# Altium PCB MCU_PCB.PcbDoc (part 2 of 2)
Units mm, origin at the board's own origin, x right, y up, seen from the top; angles counter-clockwise.
Board outline 44.96 x 8.25 mm, 4 copper layers (Top Layer, Layer 1, Layer 2, Bottom Layer), stack 0.797 mm thick; 87 components, 49 nets, 262 pads, 147 vias.
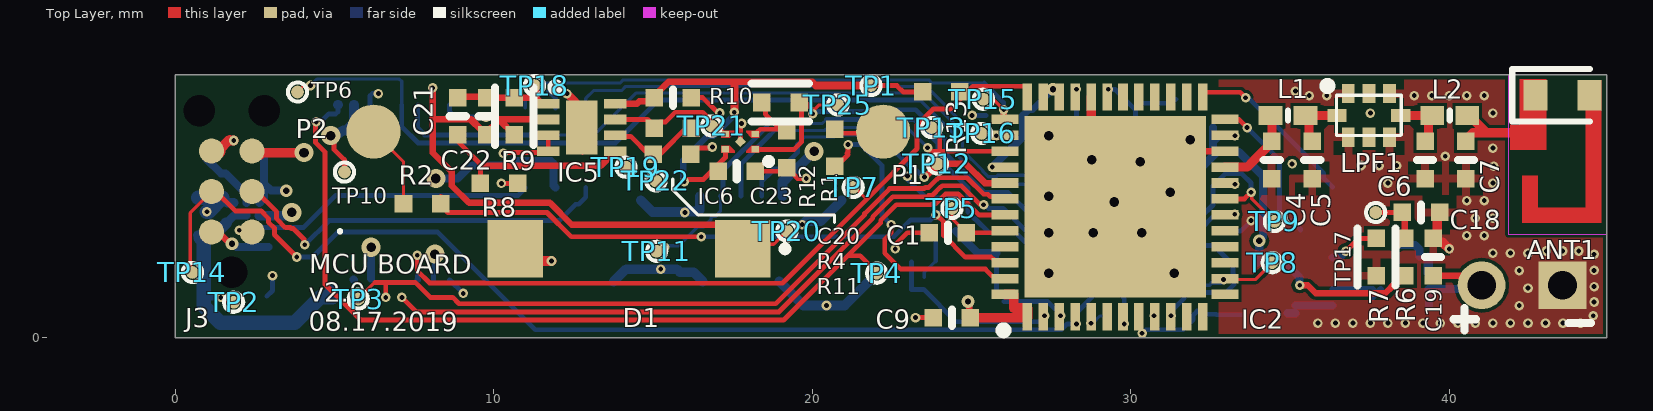
[diagram p0: Top Layer view]

## Via types
v1: diameter 0.3, hole 0.15, Top Layer to Bottom Layer, tented both sides, 123 vias
v2: diameter 0.6, hole 0.3, Top Layer to Bottom Layer, tented bottom, 12 vias
v3: diameter 0.6, hole 0.3, Top Layer to Bottom Layer, tented both sides, 7 vias
v4: diameter 0.4, hole 0.2, Top Layer to Bottom Layer, tented both sides, 5 vias

## Nets (pads, with @x,y where several pads share a name; then routed paths per layer and width w, separated by ;. In a path a pad name is that pad's centre, name@x,y a point inside that pad or via, vN(x,y) a via of type N, cw(c..) or ccw(c..) an arc to the next point about the centre after c; other vN are vias at no path point) (continued)
LH_SIG: (continued)
  Top Layer w0.152: IC6.1 19.434,5.921 19.66,6.147 19.66,7.315 R10.1 ; R10.1@19.787,7.391 20.015,7.163 v1(20.015,7.036)
  Bottom Layer w0.102: v1(31.267,0.693) v1@31.267,0.838
  Bottom Layer w0.152: v1@20.066,7.112 22.447,7.112 22.498,7.163 23.251,7.163 24.204,6.21 24.204,5.768 25.4,4.572 26.142,4.572 26.934,3.78 30.551,3.78 30.831,3.5 30.831,3.459 31.39,2.9 32.609,2.9 33.213,2.296 33.213,1.998 33.246,1.965 33.246,1.68 32.989,1.422 31.852,1.422 31.822,1.393 31.782,1.393 31.678,1.288 31.678,1.249 v1@31.267,0.838
NetANT1_1: ANT1.1 C7.2 L2.2 | length 3.1
  Top Layer w0.287: C7.2@40.538,6.23 40.748,6.44 41.178,6.44 ; L2.2@40.794,6.825 41.178,6.44 ; 42.531,6.44 41.178,6.44
  Top Layer w0.305: L2.2 40.646,6.985 40.794,6.837 L2.2@40.794,6.825 ; 42.172,6.546 42.189,6.528
  Top Layer w0.457: 42.426,6.546 42.531,6.44
NetC5_2: C5.2 L1.2 LPF1.8 | length 1.9
  Top Layer w0.287: L1.2 LPF1.8 ; C5.2@35.603,6.273 L1.2@35.603,6.873
  Top Layer w0.305: L1.2 L1.2@35.603,6.873 ; C5.2@35.603,6.273 C5.2
NetC6_2: C6.2 L2.1 LPF1.4 | length 1.9
  Top Layer w0.287: LPF1.4 L2.1 ; C6.2@39.357,6.286 L2.1@39.357,6.871
  Top Layer w0.305: C6.2 C6.2@39.357,6.286 ; L2.1@39.357,6.871 L2.1
NetC21_2: C21.2 IC5.5 R8.1 TP19.1 | length 7.1
  Top Layer w0.102: IC5.5@13.729,5.778 TP19.1
  Top Layer w0.152: C21.2 8.865,6.172 9.576,5.461 ; R8.1 9.576,5.461 ; 9.627,5.41 9.576,5.461
  Top Layer w0.203: 9.627,5.41 13.362,5.41 IC5.5@13.729,5.778 ; 13.586,5.634 IC5.5
NetDS1_1: DS1.1 R6.1 | length 4.5
  Top Layer w0.203: v1(35.306,1.651) 35.56,1.651 35.814,1.397 37.998,1.397 38.197,1.597 38.197,1.621 38.358,1.782 38.435,1.782 38.481,1.829 38.481,1.905 38.532,1.956 R6.1
  Bottom Layer w0.254: DS1.1@34.925,2.274 35.297,1.902 35.297,1.66 v1(35.306,1.651)
NetDS1_2: DS1.2 IC4.5 | length 1.4
  Bottom Layer w0.254: DS1.2@34.925,0.774 35.167,0.774 DS1.2@35.179,0.762 ; DS1.2@35.179,1.016 IC4.5@36.334,1.016
NetIC1_4: IC1.4 J3.3 | length 12.2
  Top Layer w0.152: J3.3@2.54,4.597 3.176,3.962 3.176,3.74 3.455,3.461 3.611,3.461 3.637,3.434 3.704,3.434 4.034,3.104 4.034,2.949 v1(4.062,2.921)
  Bottom Layer w0.152: v1@4.064,2.921 4.826,3.683 12.053,3.683 12.566,4.195 12.664,4.195 12.888,4.419 IC1.4
NetIC1_6: IC1.6 J3.1 | length 10.1
  Top Layer w0.152: v1(2.007,3.378) 2.057,3.327 J3.1 J3.1@2.54,3.327
  Bottom Layer w0.152: v1(2.007,3.378) 2.047,3.378 2.129,3.461 4.019,3.461 5.034,4.475 10.764,4.475 10.988,4.699 IC1.6
NetIC2_5: IC2.5 TP23.1 | length 0.6
  Top Layer w0.102: v1(28.753,0.457) 28.753,0.61 28.758,0.615 IC2.5
  Bottom Layer w0.102: v1(28.753,0.457) 28.804,0.457 29.032,0.686 TP23.1
NetIC2_9: IC2.9 TP24.1
  other v1: 30.734,0.693
NetIC3_B1: IC3.B1 L4.1 | length 2.1
  Bottom Layer w0.254: L4.1 0.98,5.616 1.428,5.168 1.578,5.168 2.235,4.51 IC3.B1
NetIC4_8: IC4.8 R7.2 | length 1.6
  Top Layer w0.152: v1(36.761,2.725) 37.16,3.124 R7.2
  Bottom Layer w0.254: IC4.8 36.564,2.528 v1(36.761,2.725)
NetIC5_7: IC5.7 IC6.4 R4.1 TP21.1 | length 4
  Top Layer w0.152: IC5.7 14.834,6.858 R4.1@14.986,6.706 ; R4.1 15.236,6.777 15.388,6.777 15.697,7.087 16.554,7.087 16.908,6.733 16.919,6.733 17.252,6.401 IC6.4
NetIC6_2: IC6.2 R10.2 R12.2 | length 1.9
  Top Layer w0.152: IC6.2 18.232,6.401 18.281,6.45 18.281,6.47 18.364,6.553 18.999,6.553 18.529,7.024 18.529,7.278 R10.2
NetP1_1: P1.1 R1.2 | length 1.5
  Top Layer w0.152: R1.2@20.701,6.426 22.174,6.426 P1.1
NetP2_1: P2.1 R2.2 | length 2.4
  Top Layer w0.102: P2.1 7.163,5.537 R2.2@7.163,4.445
NRST: C12.1 IC2.7 J2.4 TP11.1 | length 21.6
  Bottom Layer w0.102: v1(15.367,2.845) 15.418,2.896 15.803,2.896 16.385,3.477 16.588,3.477 16.817,3.707 16.817,3.761 16.877,3.821 16.966,3.821 17.115,3.97 J2.4 ; 18.542,6.604 18.669,6.731 20.32,6.731 20.447,6.858
  Bottom Layer w0.152: J2.4 17.196,4.526 17.196,5.258 18.542,6.604 ; 20.447,6.858 23.197,6.858 23.95,6.105 23.95,5.641 24.892,4.699 24.892,3.95 25.108,3.734 25.124,3.734 25.556,3.302 26.396,3.302 26.797,2.901 26.797,1.905 27.305,1.397 27.94,1.397 28.317,1.774 29.265,1.774 C12.1 29.797,1.242 v1(29.797,0.439)
RCC_OSC32_IN: C2.1 IC2.2 Y1.1 | length 7.6
  Bottom Layer w0.102: C2.1 C2.1@23.501,3.302 ; Y1.1 23.515,2.052 Y1.1@23.876,2.413 ; 23.853,3.302 23.876,3.279
  Bottom Layer w0.152: Y1.1@23.114,2.385 23.114,1.524 23.495,1.524 24.511,0.508 27.112,0.508 v1(27.297,0.693) ; C2.1@23.501,3.302 23.853,3.302 ; Y1.1@23.876,2.413 23.876,3.279
RCC_OSC32_OUT: C3.1 IC2.3 Y1.2 | length 4.8
  Bottom Layer w0.152: Y1.2@25.781,1.421 Y1.2@25.781,2.667 ; Y1.2@26.015,1.143 27.382,1.143 27.797,0.728 v1(27.797,0.693)
  Bottom Layer w0.254: C3.1@24.511,3.353 25.197,2.667 Y1.2@25.781,2.667
RCC_OSC_IN: IC2.25 Y2.3 | length 5.5
  Top Layer w0.152: IC2.25 32.258,7.696 32.273,7.712 33.436,7.712 v1(33.609,7.539)
  Bottom Layer w0.152: v1(33.609,7.539) 33.692,7.539 36.059,5.171 36.059,5.013 Y2.3
RCC_OSC_OUT: IC2.24 Y2.1 | length 4.8
  Top Layer w0.152: IC2.24 33.397,6.862 v1(33.655,6.604)
  Bottom Layer w0.152: v1(33.655,6.604) 34.671,5.588 34.671,3.937 34.92,3.688 35.059,3.688 35.333,3.414 Y2.1
RF_OUT: C4.1 IC2.21 L1.1 | length 2.6
  Top Layer w0.287: IC2.21 33.658,5.362 33.833,5.537 C4.1@34.31,6.015 ; C4.1 L1.1@34.433,6.9
  Top Layer w0.305: C4.1@34.31,6.015 34.31,6.05 C4.1
SYS_SWCLK: IC2.41 J2.2 TP12.1 | length 9.7
  Top Layer w0.203: v1(23.523,5.052) 23.549,5.052 23.771,5.273 23.825,5.273 ; TP12.1 24.822,5.462 25.422,4.862 IC2.41
  Bottom Layer w0.102: 19.533,6.082 19.761,6.311 20.69,6.311 20.751,6.372 22.076,6.372
  Bottom Layer w0.152: J2.2 18.415,4.953 18.448,4.953 18.687,5.192 18.687,5.194 18.791,5.298 19.014,5.298 19.538,5.822 19.538,6.076 19.533,6.082 ; 22.076,6.372 23.04,5.408 23.123,5.408 23.315,5.216 ; 23.315,5.215 23.404,5.126 23.409,5.126 23.483,5.052 v1(23.523,5.052)
SYS_SWDIO: IC2.39 J2.3 TP13.1 | length 11
  Top Layer w0.102: TP13.1 23.8,6.604 23.978,6.426
  Top Layer w0.152: v1(23.622,5.969) 23.729,5.862 24.003,5.862 ; 23.978,6.426 24.003,6.401 24.003,5.862 ; IC2.39 24.003,5.862
  Bottom Layer w0.102: 18.669,6.372 18.691,6.372 18.833,6.514 20.391,6.514 20.48,6.604 22.987,6.604 v1(23.622,5.969)
  Bottom Layer w0.152: J2.3 17.765,5.468 18.669,6.372
TRANS_IMP_OUT: C21.1 C22.1 IC5.1 R9.2 TP18.1 | length 3.4
  Top Layer w0.152: 11.346,7.544 11.436,7.455 11.436,7.432 11.509,7.358 IC5.1
  Top Layer w0.203: C21.1 8.888,7.567 9.756,7.567 C22.1 R9.2 11.346,7.544 11.346,7.717 11.315,7.748 11.315,7.887 TP18.1
TSC_G2_IO1: C1.2 IC2.44 TP5.1 | length 2.3
  Top Layer w0.102: TP5.1 24.384,3.759 C1.2
  Top Layer w0.152: C1.2 25.908,3.302 26.035,3.429 26.058,3.406 IC2.44
TSC_G2_IO2: IC2.45
TSC_G2_IO3: IC2.46 R2.1 | length 19.9
  Top Layer w0.152: R2.1@8.331,4.445 R2.1 8.331,4.166 8.56,3.937 11.67,3.937 12.432,3.175 v1(16.51,3.175) ; v1@23.911,3.903 23.877,3.937 v1(23.876,3.868) 23.989,3.755 24.021,3.755 24.126,3.651 24.126,3.216 24.807,2.535 25.62,2.535 25.709,2.445 25.709,2.436 25.783,2.362 IC2.46
  Bottom Layer w0.152: v1(16.51,3.175) 22.562,3.175 23.092,3.705 23.713,3.705 v1(23.876,3.868) ; v1@23.872,3.933 23.876,3.928 v1(23.876,3.868) ; v1@23.876,3.933 v1@23.967,3.933
TSC_G2_IO4: IC2.47 R1.1 | length 9.4
  Top Layer w0.152: R1.1@20.701,5.258 20.701,5.336 21.123,5.758 21.082,5.8 21.123,5.841 v1(21.123,6.07) ; v1(22.479,3.556) 22.479,3.302 22.278,3.101 22.278,2.658 22.777,2.159 25.435,2.159 25.732,1.862 IC2.47
  Bottom Layer w0.152: v1(21.123,6.07) 21.534,6.07 22.193,5.411 22.193,3.842 v1(22.479,3.556)
USB_DN: IC1.1 IC2.37 TP15.1 | length 17.2
  Top Layer w0.102: TP15.1 25.688,7.493 v1(26.011,7.17)
  Top Layer w0.203: v1(26.011,7.17) 26.011,6.909 IC2.37
  Bottom Layer w0.102: IC1.1 10.988,7.509 11.237,7.758 11.361,7.758 11.604,8.001 13.961,8.001 14.059,8.099 23.66,8.099 23.758,8.001 25.4,8.001
  Bottom Layer w0.152: 25.4,8.001 26.011,7.39 v1(26.011,7.17)
USB_DP: IC1.3 IC2.38 TP16.1 | length 14.5
  Top Layer w0.102: TP16.1 25.711,6.42 v1(25.781,6.35)
  Bottom Layer w0.102: IC1.3 12.888,7.519 13.137,7.768 14.016,7.768 14.144,7.896 23.575,7.896 25.122,6.35 v1(25.781,6.35)
VBAT_1: C19.1 IC4.3 IC4.4 J1.14 P3.2 TP10.1 | length 17
  Top Layer w0.152: v3(4.877,6.35) 4.928,6.35 4.984,6.294 4.984,5.913 5.207,5.69 5.309,5.588 TP10.1
  Top Layer w0.203: C19.1 40.365,1.956 40.67,1.651 P3.2
  Layer 1 w0.254: 9.271,6.988 9.474,7.192 9.474,7.214
  Layer 1 w0.305: 4.877,7.061 4.953,7.137 4.902,7.188
  Layer 1 w0.406: v3(4.877,6.35) 4.877,7.061
  Layer 1 w1.016: 34.369,7.493 34.369,7.356 34.642,7.083 35.375,6.35 36.477,5.248 36.477,5.096 37.473,4.099 38.25,4.099 39.114,3.236 39.114,2.611 39.69,2.034 40.507,2.034 40.89,1.651 P3.2
  Bottom Layer w0.254: IC4.3 P3.2@40.307,1.528 ; IC4.4@39.37,1.016 IC4.3@39.37,1.399 ; P3.2@40.684,1.651 P3.2
  Bottom Layer w0.305: v3(4.877,6.35) 4.906,6.35 4.957,6.401 5.033,6.325 5.18,6.472 5.228,6.472 5.273,6.518 5.363,6.518 5.608,6.763 J1.14
VBAT_MUX: C16.2 C?.1@-1.194,2.921 IC3.A2 IC3.B2 IC?.1 J1.15 TP2.1 | length 9.9
  Top Layer w0.152: v1(1.422,1.27) 1.524,1.27 1.629,1.165 1.781,1.165 TP2.1
  Bottom Layer w0.203: 0.889,1.27 v1(1.422,1.27)
  Bottom Layer w0.254: 1.6,3.607 1.603,3.607 IC3.A2 IC3.B2
  Bottom Layer w0.305: C16.2 0.8,3.137 0.8,3.23 C16.2@0.834,3.264
  Bottom Layer w0.356: C16.2@0.834,3.264 1.257,3.264 1.6,3.607
  Bottom Layer w0.457: C16.2@0.8,3.137 0.889,3.048 0.889,1.27 0.889,0.991 1.41,0.47 3.746,0.47 4.547,1.27 4.928,1.27 4.928,1.499
VDDA/VREF: C10.1 FB1.1 IC2.8 | length 3.6
  Bottom Layer w0.152: v1(30.356,0.143) 30.371,0.143 30.482,0.254 31.644,0.254 31.962,0.572 31.962,0.716 32.087,0.84 32.23,0.84 32.33,0.741 32.678,0.741 32.695,0.724 FB1.1@33.528,0.724
VFBSMPS: C8.1 IC2.31 L3.2 | length 3.4
  Bottom Layer w0.152: v1(29.297,7.805) 29.507,7.805 L3.2@30.15,7.163 ; L3.2@29.729,6.477 30.15,6.898 L3.2@30.15,7.163 ; C8.1 31.293,7.366 30.353,7.366 L3.2@30.15,7.163
VLXSMPS: IC2.33 L3.1 | length 1.5
  Bottom Layer w0.152: L3.1@27.929,6.477 28.296,6.844 28.296,7.341 28.321,7.366 28.321,7.781 v1(28.297,7.805)
pads on no net: ANT1.2 IC2.6 IC2.11 IC2.12 IC2.13 IC2.15 IC2.16 IC2.17 IC2.26 IC2.27 IC2.28 IC2.29 IC2.30 IC4.7 IC?.2 IC?.4 IC?.5 J1.13 J3.7 J3.8 J3.9 LPF1.2 LPF1.6 Y2.2 Y2.4
copper on no net: | length 0
  Bottom Layer w0.254: 5.598,1.832 5.608,1.822
  other v1: 35.068,5.461

## Polygon pours and split planes (outlines as drawn)
GND on Top Layer "Top Layer-GND" (solid, pour order 12): 32.766,8.1 32.766,7.874 32.766,0.127 44.831,0.127 44.831,8.057 44.788,8.1
no net on Top Layer "Top Layer-No Net" (solid, pour order 0): 0,8.255
VBAT_1 on Layer 1 "Layer 1-VBAT_1" (solid, pour order 4): 0.381,8.128 0.381,6.858 34.544,6.858 34.544,8.128
5V on Layer 1 "Layer 1-5V" (solid, pour order 6): 38.608,2.54 38.608,3.302 36.83,3.302 34.29,5.842 0.381,5.842 0.381,5.207 34.036,5.207 36.703,2.54
3.3V_MCU on Layer 1 "Layer 1-3.3V_MCU" (solid, pour order 8): 0.381,4.953 32.391,4.953 34.671,3.969 34.671,0.254 0.381,0.254
5V on Layer 1 "Layer 1-5V 1" (solid, pour order 18): 27.508,5.766 28.448,6.706 31.013,6.706 31.953,5.766
5V on Layer 1 "Layer 1-5V 1" (solid, pour order 16): 22.352,5.588 22.86,6.096 26.289,6.096 26.797,5.588
no net on Layer 1 "Layer 1-No Net" (solid, pour order 10): 16.573,5.207
GND on Layer 2 "Layer 2-GND" (solid, pour order 2): 0.127,8.128 0.127,0.127 44.788,0.127 44.788,8.128
GND on Bottom Layer "Bottom Layer-GND" (solid, pour order 14): 32.766,8.1 32.766,7.874 32.766,0.127 44.831,0.127 44.831,8.057 44.788,8.1

## Keep-outs
Keep-Out Layer:
  region: 44.958,8.255 41.855,8.255 41.855,3.255 44.958,3.255

## Other copper
Top Layer:
  region net NetANT1_1: 43.053,8.128 42.203,8.128 42.203,5.898 43.053,5.898
  region net NetANT1_1: 43.053,6.698 41.91,6.698 41.91,5.898 43.053,5.898
  region: 44.788,4.1 42.288,4.1 42.288,3.6 44.788,3.6
  region: 44.788,8.1 44.288,8.1 44.288,3.6 44.788,3.6
  region: 42.788,5.1 42.288,5.1 42.288,3.6 42.788,3.6

## Silkscreen, mask and mechanical layers (free items; w line width, h text height)
Top Overlay:
  lines w0.1: 15.621,4.978 15.621,4.648 16.408,3.861 19.939,3.861 20.701,3.861 20.701,3.632
  lines w0.254: 40.132,0.584 40.843,0.584 ; 40.488,0.229 40.488,0.94 ; 43.749,0.461 44.46,0.461
  text "MCU BOARD  / v2.0 / 08.17.2019" at 4.191,0.229 h0.6 r359.79
Bottom Overlay:
  lines w0.254: 39.827,0.686 40.538,0.686 ; 40.183,0.33 40.183,1.041 ; 43.764,0.559 44.475,0.559
  text "PATRICK CHWALEK / DAVID RAMSAY" at 22.555,5.639 h0.6 r359.79
Mechanical BS:
  the board outline again, w0.013